# Altium PCB MCU_FOR_DOWNLOAD_V6_8_PCS.PcbDoc (part 1 of 4)
Units mil, origin at the board's own origin, x right, y up, seen from the top; angles counter-clockwise.
Board outline 4834.06 x 3482.15 mil, 4 copper layers (Top, GND1, GND2, Bottom), stack 35.4 mil thick; 280 components, 38 nets, 1144 pads, 944 vias.
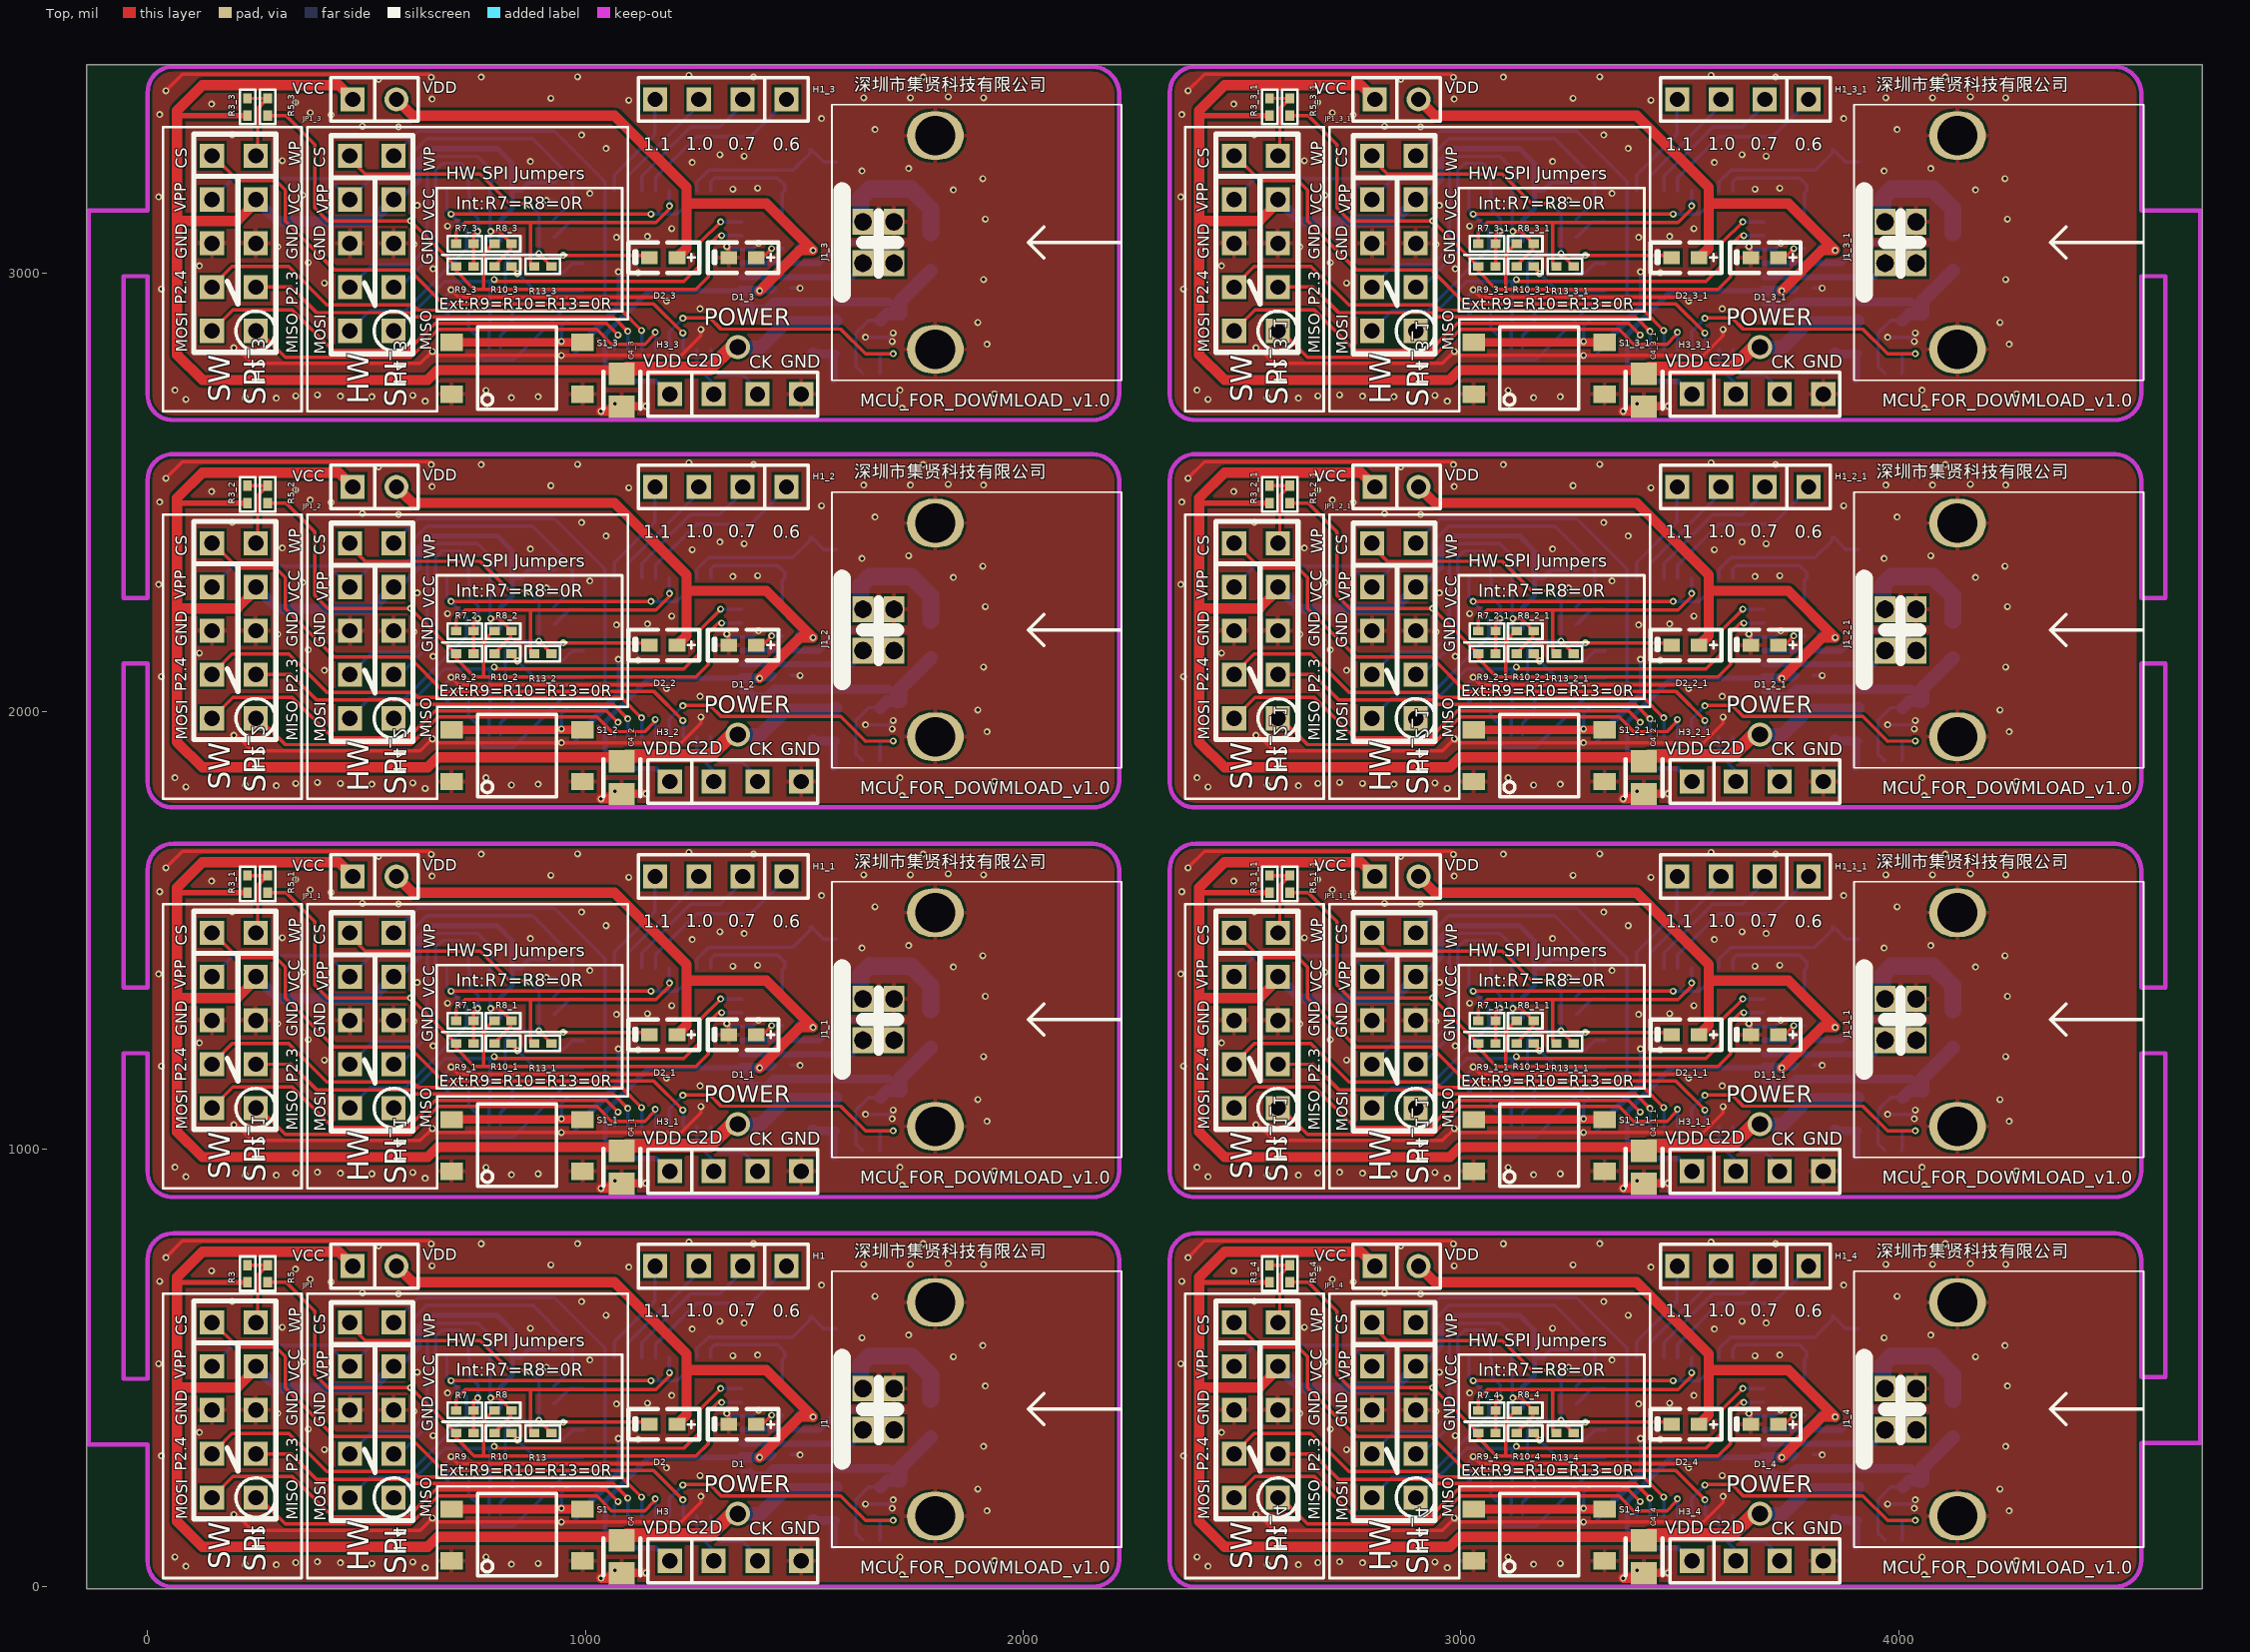
[diagram p0: Top view]
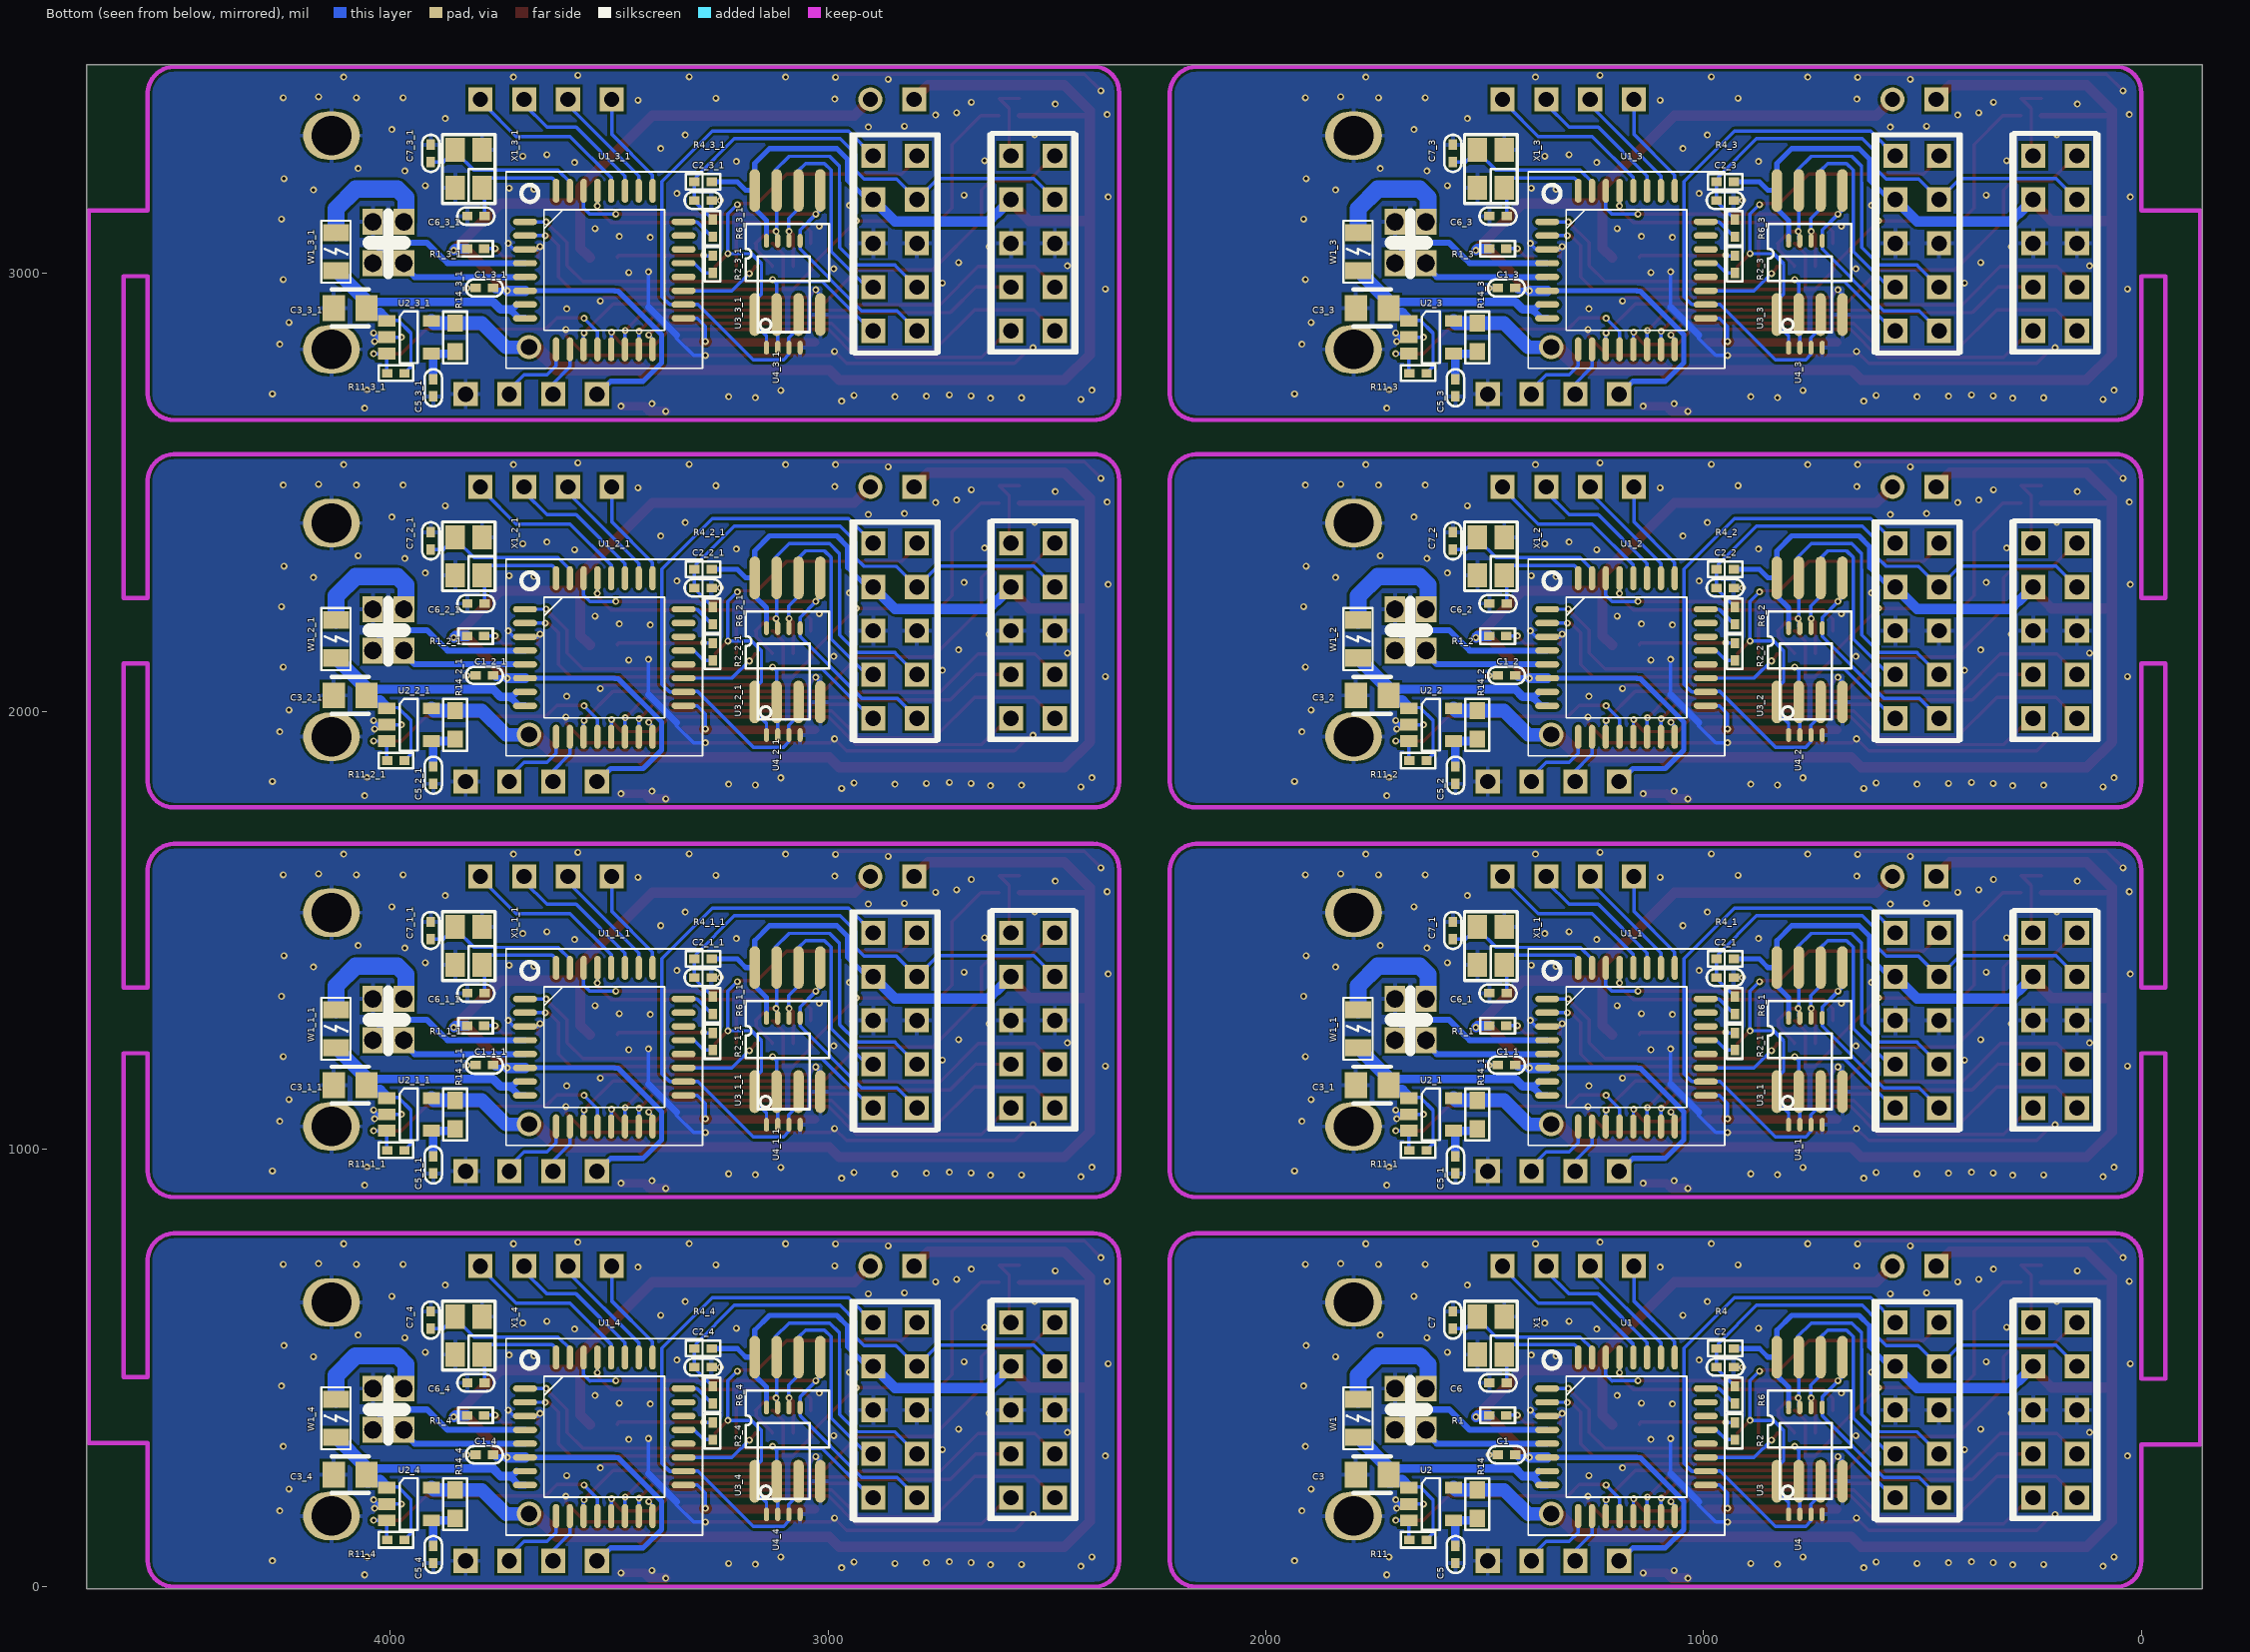
[diagram p1: Bottom view, seen from below]

## Layer stack, top to bottom
Top: signal copper 1.35
Dielectric: dielectric 10, FR-4, Dk 4.3
GND1: signal copper 1.35
Dielectric: dielectric 10, FR-4, Dk 4.3
GND2: signal copper 1.35
Dielectric: dielectric 10, FR-4, Dk 4.3
Bottom: signal copper 1.35

## Board outline
-140,-5.05 4694.06,-5.05 4694.06,3477.1 -140,3477.1

## Design rules (kind name [scope] priority, off if disabled: settings)
Clearance "'Default' PADS rule_18" [All] p1: gap=5.91
Clearance "'Default' PADS rule_15" [IsVia vs IsVia] p2: gap=5.91
ComponentClearance "'Default' PADS rule_12" [All] p1: gap=5.91 collisioncheckmode=3 verticalgap=10 showdistances=FALSE
FlightTimeFalling "'Default' PADS rule_10" [All] p1: maximum=10.00
FlightTimeRising "'Default' PADS rule_9" [All] p1: maximum=10.00
Length "'Default' PADS rule_5" [All] p1: maxlimit=50000 minlimit=0
MatchedLengths "'Default' PADS rule_11" [InNetClass('All Nets')] p1: tolerance=200 checknetsindiffpair=TRUE checkdiffpairvsdiffpair=TRUE checkothers=TRUE
MaxMinImpedance "'Default' PADS rule_8" [All] p1: minimum=50.00 maximum=150.0
ParallelSegment "'Default' PADS rule_7" [All] p1: limit=1000 gap=200
ParallelSegment "'Default' PADS rule_6" [All] p2: limit=1000 gap=200
PlaneClearance "'Default' PADS rule_14" [All] p1: clearance=15
PlaneConnect "Power Plane Connect Style - from global settings" [All] p1: planeconnectstyle=Relief reliefexpansion=20 reliefentries=2 reliefconductorwidth=15 reliefairgap=10
PolygonConnect PolygonConnect_via [IsVia] p1: connectstyle=Direct reliefconductorwidth=10 reliefentries=2 polygonreliefangle="90 Angle"
PolygonConnect PolygonConnect_Pad [All] p2: connectstyle=Relief reliefconductorwidth=10 reliefentries=4 polygonreliefangle="90 Angle"
RoutingLayers "'Default' PADS rule_3" [All] p1: top layer_v5=TRUE mid layer 1_v5=TRUE mid layer 2_v5=TRUE bottom layer_v5=TRUE
RoutingPriority "'Default' PADS rule_2" [All] p1: routingpriority=3
RoutingTopology "'Default' PADS rule" [All] p1: topology=Shortest
RoutingVias "'Default' PADS rule_4" [All] p1: holewidth=37 width=55 viastyle="Through Hole" minholewidth=37 minwidth=55 maxholewidth=37 maxwidth=55
SMDToCorner "'Default' PADS rule_16" [All] p1: distance=59055
SMDToPlane "'Default' PADS rule_17" [All] p1: distance=59055
SilkscreenOverComponentPads [All] p1: minsilkscreentomaskgap=10
SolderMaskExpansion "Solder Mask Expansion from CAM settings" [All] p1: expansion=5
Width "'Default' PADS rule_13" [All] p1: maxlimit=118.11 minlimit=5.91 preferedwidth=7.87
21 further rules are at their usual default settings.

## Components (designator, comment, footprint, x,y, rotation, side; value= is the part's Value field where it differs from the comment)
C1 "C0402" C0402 1450,301.57 r180 bottom
C1_1 "C0402" C0402 1450,1191.57 r180 bottom
C1_1_1 "C0402" C0402 3785,1191.57 r180 bottom
C1_2 "C0402" C0402 1450,2081.57 r180 bottom
C1_2_1 "C0402" C0402 3785,2081.57 r180 bottom
C1_3 "C0402" C0402 1450,2966.57 r180 bottom
C1_3_1 "C0402" C0402 3785,2966.57 r180 bottom
C1_4 "C0402" C0402 3785,301.57 r180 bottom
C2 "C0402" C0402 950.39,501.57 r0 bottom
C2_1 "C0402" C0402 950.39,1391.57 r0 bottom
C2_1_1 "C0402" C0402 3285.39,1391.57 r0 bottom
C2_2 "C0402" C0402 950.39,2281.57 r0 bottom
C2_2_1 "C0402" C0402 3285.39,2281.57 r0 bottom
C2_3 "C0402" C0402 950.39,3166.57 r0 bottom
C2_3_1 "C0402" C0402 3285.39,3166.57 r0 bottom
C2_4 "C0402" C0402 3285.39,501.57 r0 bottom
C3 "C0805" C0805 1756.69,255.91 r0 bottom
C3_1 "C0805" C0805 1756.69,1145.91 r0 bottom
C3_1_1 "C0805" C0805 4091.69,1145.91 r0 bottom
C3_2 "C0805" C0805 1756.69,2035.91 r0 bottom
C3_2_1 "C0805" C0805 4091.69,2035.91 r0 bottom
C3_3 "C0805" C0805 1756.69,2920.91 r0 bottom
C3_3_1 "C0805" C0805 4091.69,2920.91 r0 bottom
C3_4 "C0805" C0805 4091.69,255.91 r0 bottom
C4 "C0805" C0805 1083.07,68.11 r270 top
C4_1 "C0805" C0805 1083.07,958.11 r270 top
C4_1_1 "C0805" C0805 3418.07,958.11 r270 top
C4_2 "C0805" C0805 1083.07,1848.11 r270 top
C4_2_1 "C0805" C0805 3418.07,1848.11 r270 top
C4_3 "C0805" C0805 1083.07,2733.11 r270 top
C4_3_1 "C0805" C0805 3418.07,2733.11 r270 top
C4_4 "C0805" C0805 3418.07,68.11 r270 top
C5 "C0402" C0402 1566.54,73.62 r90 bottom
C5_1 "C0402" C0402 1566.54,963.62 r90 bottom
C5_1_1 "C0402" C0402 3901.54,963.62 r90 bottom
C5_2 "C0402" C0402 1566.54,1853.62 r90 bottom
C5_2_1 "C0402" C0402 3901.54,1853.62 r90 bottom
C5_3 "C0402" C0402 1566.54,2738.62 r90 bottom
C5_3_1 "C0402" C0402 3901.54,2738.62 r90 bottom
C5_4 "C0402" C0402 3901.54,73.62 r90 bottom
C6 "C0402" C0402 1469.29,465.75 r0 bottom
C6_1 "C0402" C0402 1469.29,1355.75 r0 bottom
C6_1_1 "C0402" C0402 3804.29,1355.75 r0 bottom
C6_2 "C0402" C0402 1469.29,2245.75 r0 bottom
C6_2_1 "C0402" C0402 3804.29,2245.75 r0 bottom
C6_3 "C0402" C0402 1469.29,3130.75 r0 bottom
C6_3_1 "C0402" C0402 3804.29,3130.75 r0 bottom
C6_4 "C0402" C0402 3804.29,465.75 r0 bottom
C7 "C0402" C0402 1572.44,609.06 r90 bottom
C7_1 "C0402" C0402 1572.44,1499.06 r90 bottom
C7_1_1 "C0402" C0402 3907.44,1499.06 r90 bottom
C7_2 "C0402" C0402 1572.44,2389.06 r90 bottom
C7_2_1 "C0402" C0402 3907.44,2389.06 r90 bottom
C7_3 "C0402" C0402 1572.44,3274.06 r90 bottom
C7_3_1 "C0402" C0402 3907.44,3274.06 r90 bottom
C7_4 "C0402" C0402 3907.44,609.06 r90 bottom
D1 "LED0603" LED0603 1358.27,370.87 r0 top
D1_1 "LED0603" LED0603 1358.27,1260.87 r0 top
D1_1_1 "LED0603" LED0603 3693.27,1260.87 r0 top
D1_2 "LED0603" LED0603 1358.27,2150.87 r0 top
D1_2_1 "LED0603" LED0603 3693.27,2150.87 r0 top
D1_3 "LED0603" LED0603 1358.27,3035.87 r0 top
D1_3_1 "LED0603" LED0603 3693.27,3035.87 r0 top
D1_4 "LED0603" LED0603 3693.27,370.87 r0 top
D2 "LED0603" LED0603 1177.17,370.87 r0 top
D2_1 "LED0603" LED0603 1177.17,1260.87 r0 top
D2_1_1 "LED0603" LED0603 3512.17,1260.87 r0 top
D2_2 "LED0603" LED0603 1177.17,2150.87 r0 top
D2_2_1 "LED0603" LED0603 3512.17,2150.87 r0 top
D2_3 "LED0603" LED0603 1177.17,3035.87 r0 top
D2_3_1 "LED0603" LED0603 3512.17,3035.87 r0 top
D2_4 "LED0603" LED0603 3512.17,370.87 r0 top
H1 "H04X1_SQUARE" H04X1_SQUARE 1459.06,732.28 r180 top
H1_1 "H04X1_SQUARE" H04X1_SQUARE 1459.06,1622.28 r180 top
H1_1_1 "H04X1_SQUARE" H04X1_SQUARE 3794.06,1622.28 r180 top
H1_2 "H04X1_SQUARE" H04X1_SQUARE 1459.06,2512.28 r180 top
H1_2_1 "H04X1_SQUARE" H04X1_SQUARE 3794.06,2512.28 r180 top
H1_3 "H04X1_SQUARE" H04X1_SQUARE 1459.06,3397.28 r180 top
H1_3_1 "H04X1_SQUARE" H04X1_SQUARE 3794.06,3397.28 r180 top
H1_4 "H04X1_SQUARE" H04X1_SQUARE 3794.06,732.28 r180 top
H2 "JH2X5" JH2X5 196.85,403.54 r90 top
H2_1 "JH2X5" JH2X5 196.85,1293.54 r90 top
H2_1_1 "JH2X5" JH2X5 2531.85,1293.54 r90 top
H2_2 "JH2X5" JH2X5 196.85,2183.54 r90 top
H2_2_1 "JH2X5" JH2X5 2531.85,2183.54 r90 top
H2_3 "JH2X5" JH2X5 196.85,3068.54 r90 top
H2_3_1 "JH2X5" JH2X5 2531.85,3068.54 r90 top
H2_4 "JH2X5" JH2X5 2531.85,403.54 r90 top
H3 "H04X1_SQUARE" H04X1_SQUARE 1192.91,59.06 r0 top
H3_1 "H04X1_SQUARE" H04X1_SQUARE 1192.91,949.06 r0 top
H3_1_1 "H04X1_SQUARE" H04X1_SQUARE 3527.91,949.06 r0 top
H3_2 "H04X1_SQUARE" H04X1_SQUARE 1192.91,1839.06 r0 top
H3_2_1 "H04X1_SQUARE" H04X1_SQUARE 3527.91,1839.06 r0 top
H3_3 "H04X1_SQUARE" H04X1_SQUARE 1192.91,2724.06 r0 top
H3_3_1 "H04X1_SQUARE" H04X1_SQUARE 3527.91,2724.06 r0 top
H3_4 "H04X1_SQUARE" H04X1_SQUARE 3527.91,59.06 r0 top
H4 "JH2X5" JH2X5 511.81,403.54 r90 top
H4_1 "JH2X5" JH2X5 511.81,1293.54 r90 top
H4_1_1 "JH2X5" JH2X5 2846.81,1293.54 r90 top
H4_2 "JH2X5" JH2X5 511.81,2183.54 r90 top
H4_2_1 "JH2X5" JH2X5 2846.81,2183.54 r90 top
H4_3 "JH2X5" JH2X5 511.81,3068.54 r90 top
H4_3_1 "JH2X5" JH2X5 2846.81,3068.54 r90 top
H4_4 "JH2X5" JH2X5 2846.81,403.54 r90 top
J1 "USB-6" USB-6 1633.86,405.51 r90 top
J1_1 "USB-6" USB-6 1633.86,1295.51 r90 top
J1_1_1 "USB-6" USB-6 3968.86,1295.51 r90 top
J1_2 "USB-6" USB-6 1633.86,2185.51 r90 top
J1_2_1 "USB-6" USB-6 3968.86,2185.51 r90 top
J1_3 "USB-6" USB-6 1633.86,3070.51 r90 top
J1_3_1 "USB-6" USB-6 3968.86,3070.51 r90 top
J1_4 "USB-6" USB-6 3968.86,405.51 r90 top
JP1 "H02X1" H02X1 468.11,732.28 r0 top
JP1_1 "H02X1" H02X1 468.11,1622.28 r0 top
JP1_1_1 "H02X1" H02X1 2803.11,1622.28 r0 top
JP1_2 "H02X1" H02X1 468.11,2512.28 r0 top
JP1_2_1 "H02X1" H02X1 2803.11,2512.28 r0 top
JP1_3 "H02X1" H02X1 468.11,3397.28 r0 top
JP1_3_1 "H02X1" H02X1 2803.11,3397.28 r0 top
JP1_4 "H02X1" H02X1 2803.11,732.28 r0 top
R1 "R0402" R0402 1470.08,391.34 r0 bottom
R1_1 "R0402" R0402 1470.08,1281.34 r0 bottom
R1_1_1 "R0402" R0402 3805.08,1281.34 r0 bottom
R1_2 "R0402" R0402 1470.08,2171.34 r0 bottom
R1_2_1 "R0402" R0402 3805.08,2171.34 r0 bottom
R1_3 "R0402" R0402 1470.08,3056.34 r0 bottom
R1_3_1 "R0402" R0402 3805.08,3056.34 r0 bottom
R1_4 "R0402" R0402 3805.08,391.34 r0 bottom
R2 "R0402" R0402 928.35,355.51 r270 bottom
R2_1 "R0402" R0402 928.35,1245.51 r270 bottom
R2_1_1 "R0402" R0402 3263.35,1245.51 r270 bottom
R2_2 "R0402" R0402 928.35,2135.51 r270 bottom
R2_2_1 "R0402" R0402 3263.35,2135.51 r270 bottom
R2_3 "R0402" R0402 928.35,3020.51 r270 bottom
R2_3_1 "R0402" R0402 3263.35,3020.51 r270 bottom
R2_4 "R0402" R0402 3263.35,355.51 r270 bottom
R3 "R0402" R0402 227.95,714.96 r270 top
R3_1 "R0402" R0402 227.95,1604.96 r270 top
R3_1_1 "R0402" R0402 2562.95,1604.96 r270 top
R3_2 "R0402" R0402 227.95,2494.96 r270 top
R3_2_1 "R0402" R0402 2562.95,2494.96 r270 top
R3_3 "R0402" R0402 227.95,3379.96 r270 top
R3_3_1 "R0402" R0402 2562.95,3379.96 r270 top
R3_4 "R0402" R0402 2562.95,714.96 r270 top
R4 "R0402" R0402 950.39,544.09 r180 bottom
R4_1 "R0402" R0402 950.39,1434.09 r180 bottom
R4_1_1 "R0402" R0402 3285.39,1434.09 r180 bottom
R4_2 "R0402" R0402 950.39,2324.09 r180 bottom
R4_2_1 "R0402" R0402 3285.39,2324.09 r180 bottom
R4_3 "R0402" R0402 950.39,3209.09 r180 bottom
R4_3_1 "R0402" R0402 3285.39,3209.09 r180 bottom
R4_4 "R0402" R0402 3285.39,544.09 r180 bottom
R5 "R0402" R0402 274.02,714.96 r270 top
R5_1 "R0402" R0402 274.02,1604.96 r270 top
R5_1_1 "R0402" R0402 2609.02,1604.96 r270 top
R5_2 "R0402" R0402 274.02,2494.96 r270 top
R5_2_1 "R0402" R0402 2609.02,2494.96 r270 top
R5_3 "R0402" R0402 274.02,3379.96 r270 top
R5_3_1 "R0402" R0402 2609.02,3379.96 r270 top
R5_4 "R0402" R0402 2609.02,714.96 r270 top
R6 "R0402" R0402 928.35,438.19 r90 bottom
R6_1 "R0402" R0402 928.35,1328.19 r90 bottom
R6_1_1 "R0402" R0402 3263.35,1328.19 r90 bottom
R6_2 "R0402" R0402 928.35,2218.19 r90 bottom
R6_2_1 "R0402" R0402 3263.35,2218.19 r90 bottom
R6_3 "R0402" R0402 928.35,3103.19 r90 bottom
R6_3_1 "R0402" R0402 3263.35,3103.19 r90 bottom
R6_4 "R0402" R0402 3263.35,438.19 r90 bottom
R7 "R0402" R0402 724.41,402.76 r180 top
R7_1 "R0402" R0402 724.41,1292.76 r180 top
R7_1_1 "R0402" R0402 3059.41,1292.76 r180 top
R7_2 "R0402" R0402 724.41,2182.76 r180 top
R7_2_1 "R0402" R0402 3059.41,2182.76 r180 top
R7_3 "R0402" R0402 724.41,3067.76 r180 top
R7_3_1 "R0402" R0402 3059.41,3067.76 r180 top
R7_4 "R0402" R0402 3059.41,402.76 r180 top
R8 "R0402" R0402 811.81,402.76 r0 top
R8_1 "R0402" R0402 811.81,1292.76 r0 top
R8_1_1 "R0402" R0402 3146.81,1292.76 r0 top
R8_2 "R0402" R0402 811.81,2182.76 r0 top
R8_2_1 "R0402" R0402 3146.81,2182.76 r0 top
R8_3 "R0402" R0402 811.81,3067.76 r0 top
R8_3_1 "R0402" R0402 3146.81,3067.76 r0 top
R8_4 "R0402" R0402 3146.81,402.76 r0 top
R9 "R0402" R0402 724.41,351.18 r180 top
R9_1 "R0402" R0402 724.41,1241.18 r180 top
R9_1_1 "R0402" R0402 3059.41,1241.18 r180 top
R9_2 "R0402" R0402 724.41,2131.18 r180 top
R9_2_1 "R0402" R0402 3059.41,2131.18 r180 top
R9_3 "R0402" R0402 724.41,3016.18 r180 top
R9_3_1 "R0402" R0402 3059.41,3016.18 r180 top
R9_4 "R0402" R0402 3059.41,351.18 r180 top
R10 "R0402" R0402 811.81,351.18 r180 top
R10_1 "R0402" R0402 811.81,1241.18 r180 top
R10_1_1 "R0402" R0402 3146.81,1241.18 r180 top
R10_2 "R0402" R0402 811.81,2131.18 r180 top
R10_2_1 "R0402" R0402 3146.81,2131.18 r180 top
R10_3 "R0402" R0402 811.81,3016.18 r180 top
R10_3_1 "R0402" R0402 3146.81,3016.18 r180 top
R10_4 "R0402" R0402 3146.81,351.18 r180 top
R11 "R0402" R0402 1652.36,107.09 r0 bottom
R11_1 "R0402" R0402 1652.36,997.09 r0 bottom
R11_1_1 "R0402" R0402 3987.36,997.09 r0 bottom
R11_2 "R0402" R0402 1652.36,1887.09 r0 bottom
R11_2_1 "R0402" R0402 3987.36,1887.09 r0 bottom
R11_3 "R0402" R0402 1652.36,2772.09 r0 bottom
R11_3_1 "R0402" R0402 3987.36,2772.09 r0 bottom
R11_4 "R0402" R0402 3987.36,107.09 r0 bottom
R13 "R0402" R0402 902.76,351.18 r0 top
R13_1 "R0402" R0402 902.76,1241.18 r0 top
R13_1_1 "R0402" R0402 3237.76,1241.18 r0 top
R13_2 "R0402" R0402 902.76,2131.18 r0 top
R13_2_1 "R0402" R0402 3237.76,2131.18 r0 top
R13_3 "R0402" R0402 902.76,3016.18 r0 top
R13_3_1 "R0402" R0402 3237.76,3016.18 r0 top
R13_4 "R0402" R0402 3237.76,351.18 r0 top
R14 "R0603" R0603 1516.93,188.58 r270 bottom
R14_1 "R0603" R0603 1516.93,1078.58 r270 bottom
R14_1_1 "R0603" R0603 3851.93,1078.58 r270 bottom
R14_2 "R0603" R0603 1516.93,1968.58 r270 bottom
R14_2_1 "R0603" R0603 3851.93,1968.58 r270 bottom
R14_3 "R0603" R0603 1516.93,2853.58 r270 bottom
R14_3_1 "R0603" R0603 3851.93,2853.58 r270 bottom
R14_4 "R0603" R0603 3851.93,188.58 r270 bottom
S1 "4PIN_SWITCH_SMD_4.5MM" 4PIN_SWITCH_SMD_4.5MM 843.7,118.11 r90 top
S1_1 "4PIN_SWITCH_SMD_4.5MM" 4PIN_SWITCH_SMD_4.5MM 843.7,1008.11 r90 top
S1_1_1 "4PIN_SWITCH_SMD_4.5MM" 4PIN_SWITCH_SMD_4.5MM 3178.7,1008.11 r90 top
S1_2 "4PIN_SWITCH_SMD_4.5MM" 4PIN_SWITCH_SMD_4.5MM 843.7,1898.11 r90 top
S1_2_1 "4PIN_SWITCH_SMD_4.5MM" 4PIN_SWITCH_SMD_4.5MM 3178.7,1898.11 r90 top
S1_3 "4PIN_SWITCH_SMD_4.5MM" 4PIN_SWITCH_SMD_4.5MM 843.7,2783.11 r90 top
S1_3_1 "4PIN_SWITCH_SMD_4.5MM" 4PIN_SWITCH_SMD_4.5MM 3178.7,2783.11 r90 top
S1_4 "4PIN_SWITCH_SMD_4.5MM" 4PIN_SWITCH_SMD_4.5MM 3178.7,118.11 r90 top
U1 "LQFP-32" LQFP-32 1357.09,452.76 r180 bottom
U1_1 "LQFP-32" LQFP-32 1357.09,1342.76 r180 bottom
U1_1_1 "LQFP-32" LQFP-32 3692.09,1342.76 r180 bottom
U1_2 "LQFP-32" LQFP-32 1357.09,2232.76 r180 bottom
U1_2_1 "LQFP-32" LQFP-32 3692.09,2232.76 r180 bottom
U1_3 "LQFP-32" LQFP-32 1357.09,3117.76 r180 bottom
U1_3_1 "LQFP-32" LQFP-32 3692.09,3117.76 r180 bottom
U1_4 "LQFP-32" LQFP-32 3692.09,452.76 r180 bottom
U2 "SOT23-5_SGM2019" SOT23-5_SGM2019 1673.23,188.98 r180 bottom
U2_1 "SOT23-5_SGM2019" SOT23-5_SGM2019 1673.23,1078.98 r180 bottom
U2_1_1 "SOT23-5_SGM2019" SOT23-5_SGM2019 4008.23,1078.98 r180 bottom
U2_2 "SOT23-5_SGM2019" SOT23-5_SGM2019 1673.23,1968.98 r180 bottom
U2_2_1 "SOT23-5_SGM2019" SOT23-5_SGM2019 4008.23,1968.98 r180 bottom
U2_3 "SOT23-5_SGM2019" SOT23-5_SGM2019 1673.23,2853.98 r180 bottom
U2_3_1 "SOT23-5_SGM2019" SOT23-5_SGM2019 4008.23,2853.98 r180 bottom
U2_4 "SOT23-5_SGM2019" SOT23-5_SGM2019 4008.23,188.98 r180 bottom
U3 "SO8W" SO8W 757.48,382.68 r180 bottom
U3_1 "SO8W" SO8W 757.48,1272.68 r180 bottom
U3_1_1 "SO8W" SO8W 3092.48,1272.68 r180 bottom
U3_2 "SO8W" SO8W 757.48,2162.68 r180 bottom
U3_2_1 "SO8W" SO8W 3092.48,2162.68 r180 bottom
U3_3 "SO8W" SO8W 757.48,3047.68 r180 bottom
U3_3_1 "SO8W" SO8W 3092.48,3047.68 r180 bottom
U3_4 "SO8W" SO8W 3092.48,382.68 r180 bottom
U4 "SO8-TSS" SO8-TSS 805.51,165.35 r90 bottom
U4_1 "SO8-TSS" SO8-TSS 805.51,1055.35 r90 bottom
U4_1_1 "SO8-TSS" SO8-TSS 3140.51,1055.35 r90 bottom
U4_2 "SO8-TSS" SO8-TSS 805.51,1945.35 r90 bottom
U4_2_1 "SO8-TSS" SO8-TSS 3140.51,1945.35 r90 bottom
U4_3 "SO8-TSS" SO8-TSS 805.51,2830.35 r90 bottom
U4_3_1 "SO8-TSS" SO8-TSS 3140.51,2830.35 r90 bottom
U4_4 "SO8-TSS" SO8-TSS 3140.51,165.35 r90 bottom
W1 "SMD0805" SMD0805 1788.98,384.65 r90 bottom
W1_1 "SMD0805" SMD0805 1788.98,1274.65 r90 bottom
W1_1_1 "SMD0805" SMD0805 4123.98,1274.65 r90 bottom
W1_2 "SMD0805" SMD0805 1788.98,2164.65 r90 bottom
W1_2_1 "SMD0805" SMD0805 4123.98,2164.65 r90 bottom
W1_3 "SMD0805" SMD0805 1788.98,3049.65 r90 bottom
W1_3_1 "SMD0805" SMD0805 4123.98,3049.65 r90 bottom
W1_4 "SMD0805" SMD0805 4123.98,384.65 r90 bottom
X1 "3225_4" 3225_4 1485.83,573.62 r90 bottom
X1_1 "3225_4" 3225_4 1485.83,1463.62 r90 bottom
X1_1_1 "3225_4" 3225_4 3820.83,1463.62 r90 bottom
X1_2 "3225_4" 3225_4 1485.83,2353.62 r90 bottom
X1_2_1 "3225_4" 3225_4 3820.83,2353.62 r90 bottom
X1_3 "3225_4" 3225_4 1485.83,3238.62 r90 bottom
X1_3_1 "3225_4" 3225_4 3820.83,3238.62 r90 bottom
X1_4 "3225_4" 3225_4 3820.83,573.62 r90 bottom

## Footprints (in the part's own frame and the unit in brackets; to place one, negate y for a bottom-side part, rotate by r counter-clockwise, add the part's x,y. Pads: shape width x height; smd on the part's side, far side on the other; paste and mask are expansions set on the pad)
4PIN_SWITCH_SMD_4.5MM [mm]
  rect 1x1.3 smd: 1(-1.5,3.8) 2(1.5,3.8) 3(-1.5,-3.8) 4(1.5,-3.8)
  silkscreen extent -2.37,-2.3 2.4,2.3
3225_4 [mm]
  rect 1.4x1.15 smd: 1(-1.1,-0.782) 2(1.1,-0.782) 3(1.1,0.782) 4(-1.1,0.782)
  silkscreen extent -2,-1.52 2,1.52
C0402 [mm]
  rect 0.6x0.5 smd: 1(-0.5,0) 2(0.5,0)
  silkscreen extent -1.07,-0.5 1.07,0.5
C0805 [mil]
  rect 50.98x59.02 smd: 1(-37.48,0) 2(37.48,0)
  silkscreen extent -43,-42 43,42
H02X1 [mil]
  rect 55x55 / inner round 55 / far side rect 55x55 hole 35: 1(0,0)
  round 55 hole 35: 2(100,0)
  silkscreen extent -50,-50 150,50
H04X1_SQUARE [mil]
  rect 55x55 hole 35: 1(0,0) 2(100,0) 3(200,0) 4(300,0)
  silkscreen extent -50,-50 338,50
JH2X5 [mil]
  rect 55x55 hole 35: 1(-200,-50) 2(-200,50) 3(-100,-50) 4(-100,50) 5(0,-50) 6(0,50) 7(100,-50) 8(100,50) 9(200,-50) 10(200,50)
  silkscreen extent -245,-95 -155,-5
LED0603 [mil]
  rect 38x30 smd paste+1.18 mask+1.18: 1(-31,0) 2(31.99,0)
  silkscreen extent -79,-35 83,35
LQFP-32 [mm]
  oval 1.4x0.37 smd: 1(0,0) 2(0,-0.8) 3(0,-1.6) 4(0,-2.4) 5(0,-3.2) 6(0,-4) 7(0,-4.8) 8(0,-5.6) 17(9.2,-5.6) 18(9.2,-4.8) 19(9.2,-4) 20(9.2,-3.2) 21(9.2,-2.4) 22(9.2,-1.6) 23(9.2,-0.8) 24(9.2,0)
  oval 0.37x1.4 smd: 9(1.8,-7.4) 10(2.6,-7.4) 11(3.4,-7.4) 12(4.2,-7.4) 13(5,-7.4) 14(5.8,-7.4) 15(6.6,-7.4) 16(7.4,-7.4) 25(7.4,1.8) 26(6.6,1.8) 27(5.8,1.8) 28(5,1.8) 29(4.2,1.8) 30(3.4,1.8) 31(2.6,1.8) 32(1.8,1.8)
  silkscreen extent -1.1,-8.5 10.3,2.9
R0402 [mm]
  rect 0.6x0.5 smd: 1(-0.5,0) 2(0.5,0)
  silkscreen extent -1,-0.45 1,0.45
R0603 [mm]
  rect 1x0.9 smd: 1(-0.826,0) 2(0.826,0)
  silkscreen extent -1.5,-0.7 1.5,0.7
SMD0805 [mm]
  rect 1x1.5 smd paste-0.1 mask-0.1: 1(-1.1,0) 2(1.1,0)
  silkscreen extent -1.8,-0.85 1.8,0.85
SO8-TSS [mm]
  oval 0.8x0.3 smd: 1(0,0) 2(0,-0.65) 3(0,-1.3) 4(0,-1.95) 5(6.2,-1.95) 6(6.2,-1.3) 7(6.2,-0.65) 8(6.2,0)
  silkscreen extent 0.9,-2.5 5.3,0.5
SO8W [mil]
  oval 24x97.62 smd paste-11.81 mask-11.81: 1(-75,-141.73) 2(-25,-141.73) 3(25,-141.73) 4(75,-141.73) 5(75,141.73) 6(25,141.73) 7(-25,141.73) 8(-75,141.73)
  silkscreen extent -95,-65 95,65
SOT23-5_SGM2019 [mm]
  rect 1x0.69 smd: 1(0,0.95) 2(0,0) 3(0,-0.95) 4(2.6,-0.95) 5(2.6,0.95)
  silkscreen extent 0.76,-1.5 1.8,1.5
USB-6 [mm]
  rect 1.5x1.2 / inner rect 0x0 / far side rect 1.5x1.2 hole 1: 1(1.2,0) 2(-1.2,0) 3(-1.2,-1.8) 4(1.2,-1.8)
  oval 2.8x3.3 / inner round 0 / far side oval 2.8x3.3 hole 2.3: 5(6.2,-4.2) 6(-6.2,-4.2)
  silkscreen extent -8,-15 8,1.8

## Via types
v1: diameter 16/16/16/16 (per signal layer), hole 8, Top to Bottom, 936 vias
v2: diameter 55/55/55/55 (per signal layer), hole 37, Top to Bottom, 8 vias

## Nets (pads, with @x,y where several pads share a name; then routed paths per layer and width w, separated by ;. In a path a pad name is that pad's centre, name@x,y a point inside that pad or via, vN(x,y) a via of type N, cw(c..) or ccw(c..) an arc to the next point about the centre after c; other vN are vias at no path point)
+5V: C3.1 R11.1 U1.7 U1.8 U2.1 W1.1 | length 791.9
  Bottom w7.87: R11.1@1632.68,107.09 1619.29,120.47 1617.72,120.47 1617.72,198.57 1646.88,227.73 1647.02,227.73 1647.24,227.95 1673.23,227.95 1674.02,227.18 U2.1@1673.23,226.38
  Bottom w9.84: U1.7@1357.09,263.78 U1.7@1376.38,263.78
  Bottom w15.75: U1.8@1357.09,232.28 1370.87,232.28 1389.37,250.79 U1.7@1376.38,263.78
  Bottom w19.68: 1389.37,250.79 1391.14,252.56 1412.8,252.56 1430.31,270.08 1692.05,270.08 1718.9,256.07 C3.1@1719.21,255.91
  Bottom w27.56: U2.1@1674.02,227.18 1688.98,242.52 C3.1@1712.99,242.52
  Bottom w31.5: C3.1@1712.99,242.52 1718.82,242.52 C3.1@1718.9,245.19 ; W1.1@1788.98,341.34 1718.9,271.26 1718.9,256.07 1718.9,255.91 C3.1@1718.9,245.19 ; C3.1@1718.9,245.19 1718.9,243.23 C3.1@1719.21,255.91 C3.1@1718.9,245.19
C2CK: H3.3 U1.9 | length 186.3
  Bottom w7.87: U1.9@1286.22,161.42 1286.22,123.62 1306.5,103.35 1359.06,103.35 1398.13,64.27 1400.79,61.61 H3.3@1392.91,59.06
C2D: H3.2 U1.10 | length 130.9
  Bottom w7.87: U1.10@1254.72,161.42 1254.72,122.05 1297.01,79.76 1297.01,59.26 1300.59,59.26 H3.2@1292.91,59.06
GGND: C1.1 C2.1 C3.2 C4.2 C5.1 C6.2 C7.2 D1.1 H2.5 H2.6 H3.4 H4.5 H4.6 J1.4 J1.5 J1.6 S1.1 S1.3 U1.3 U2.2 U3.4 U4.4 X1.2 X1.4 | length 2977.8
  Top w7.87: v1(41.34,751.97) 79.53,790.16 644.09,790.16 648.03,786.22 v1(648.03,783.07) ; v1(196.85,164.96) 202.76,164.96 238.58,129.13 622.83,129.13 v1@648.83,155.13 ; v1(692.91,297.24) 693.31,297.24 710.63,279.92 1176.77,279.92 v1(1185.04,271.65) ; v1(1263.78,206.69) 1263.39,192.13 1218.9,147.64 v1(944.88,147.64) 660.24,147.64 649.21,154.89 v1@648.83,155.13 ; v1(1322.83,396.06) 1327.27,391.63 D1.1@1327.27,370.87 ; v1@648.83,155.13 646.46,156.69 v1(650.39,156.69) v1@648.83,155.13
  Top w19.68: C4.2@1083.07,30.63 1083.94,31.5 v1(1137.8,31.5)
  Top w22.05: v1(1035.43,19.69) 1072.13,19.69 1078.39,25.95 C4.2@1083.07,30.63
  Bottom w7.87: v1(692.91,297.24) 692.91,296.65 U3.4@682.48,286.22 ; v1(910.63,501.57) 911.02,501.57 C2.1@930.71,501.57 ; v1(944.88,147.64) 972.05,147.64 1011.02,186.61 1011.02,193.7 ; v1(1074.8,338.58) 1075.2,338.19 1075.2,257.87 ; v1(1322.83,396.06) 1328.6,390.3 1328.6,390.01 1328.85,389.76 U1.3@1357.09,389.76 1381.89,389.76 v1(1395.67,403.54) ; C1.1@1469.68,301.58 1489.76,301.58 v1(1490.16,301.18) ; v1(1639.76,188.98) U2.2@1673.23,188.98 1690.94,188.98 U2.2@1691.73,188.19 ; v1(1700.79,179.13) U2.2@1691.73,188.19 ; v1(1702.76,198.82) 1692.13,188.19 U2.2@1691.73,188.19 ; U3.4@682.48,286.22 U3.4@682.48,240.94 682.48,238 686.32,241.84 U3.4@682.48,286.22
  Bottom w15.75: 1011.02,193.7 1075.2,257.87
  other v1: 1723.62,27.17 1066.93,37.4 633.86,43.31 87.4,46.85 293.7,50 222.83,50.79 830.71,51.18 512.2,53.15 891.73,53.15 338.19,55.12 440.16,54.72 605.51,56.3 387.8,57.09 1934.25,59.45 61.81,68.11 772.83,67.72 1718.5,68.11 1917.32,173.23 1896.46,222.83 1261.81,253.94 31.5,299.21 403.54,312.99 1909.45,320.87 1120.08,336.61 651.97,345.28 118.11,352.36 366.54,359.84 297.24,395.67 608.27,401.18 1070.87,417.32 1141.73,419.29 1196.85,437.01 685.04,442.91 1913.39,458.66 616.14,490.16 25.2,509.45 354.33,513.78 1009.84,517.72 1840.55,525.59 1336.61,527.56 1393.31,529.53 1584.65,535.43 1907.48,551.18 1631.89,568.9 1738.19,574.8 1244.09,588.58 874.02,590.55 307.09,592.52 1362.2,602.36 1307.09,606.3 1047.24,620.08 991.34,651.18 192.91,651.57 1661.42,663.39 572.83,669.29 490.16,671.26 1539.37,688.98 419.29,696.46 27.56,697.64 371.26,701.97 145.67,721.65 337.4,725.59 1098.82,730.31 649.61,733.07 921.26,735.04 1635.83,736.22 1742.13,736.22 1909.45,736.22 1828.74,738.19 527.56,778.35 761.81,783.46 982.28,783.86 1383.86,783.46 1771.65,783.46 1236.22,787.4
HW_HOLD: R10.1 U1.19 | length 188.6
  Top w7.87: R10.1@831.5,351.18 832.28,350.39 832.28,348.03 838.39,341.93 838.39,340.75 v1(844.49,334.65)
  Bottom w7.87: v1(844.49,334.65) 845.28,334.65 884.65,295.28 U1.19@994.88,295.28
HW_HOLD_1: H4.4 R8.2 R10.2 U3.7 U4.7 | length 860.6
  Top w7.87: v1(783.46,431.1) 803.15,431.1 R8.2@831.5,402.76 ; R10.2@792.13,351.18 792.13,352.76 828.74,389.37 828.74,401.22 829.12,401.59 R8.2@829.12,401.95
  Bottom w7.87: H4.4@461.81,303.54 511.42,353.15 511.42,353.94 598.82,353.94 638.58,393.7 638.58,542.91 638.98,543.31 638.98,580.31 661.02,602.36 753.9,602.36 785.12,571.14 785.12,527.05 U3.7@782.48,524.41 782.48,431.1 v1@782.48,430.31 ; U4.7@779.92,409.45 782.48,412.01 v1@782.48,430.31 ; v1(783.46,431.1) 782.68,430.31 v1@782.48,430.31
HW_MISO: H4.1 U1.1 U3.2 U4.2 | length 1088.6
  Top w7.87: v1(791.34,320.87) 795.67,316.54 795.67,316.34 1225.2,316.34 1261.42,352.56 1261.42,405.12 v1(1309.06,452.76)
  Bottom w7.87: H4.1@565.4,210.1 569.82,210.1 570.87,209.06 677.97,316.16 782.48,316.16 782.48,313.78 ; U4.2@779.92,165.35 779.92,219.69 782.48,222.24 U3.2@782.48,240.94 782.48,313.78 ; v1(791.34,320.87) 784.25,313.78 782.48,313.78 ; v1(1309.06,452.76) U1.1@1357.09,452.76
  Bottom w11.81: H4.1@561.81,203.54 565.4,207.13 H4.1@565.4,210.1
HW_MOSI: H4.2 U1.30 U3.5 U4.5 | length 1074.3
  Top w7.87: v1(692.91,470.47) v1(1149.61,470.47)
  Bottom w7.87: H4.2@463.55,206.92 464.09,206.92 465.75,208.58 466.54,208.58 507.56,249.61 587.8,249.61 728.74,390.55 U4.5@728.74,409.45 728.74,433.86 692.52,470.08 v1@692.13,470.47 ; U3.5@682.48,524.41 683.46,523.43 683.46,479.13 v1@692.13,470.47 ; v1(692.91,470.47) v1@692.13,470.47 ; v1(1149.61,470.47) 1208.27,470.47 1208.66,470.08 1223.23,484.65 U1.30@1223.23,523.62
  Bottom w11.81: H4.2@461.81,203.54 H4.2@463.55,206.92
HW_NSS: R7.2 R13.1 U1.29 | length 677.5
  Top w7.87: R7.2@704.72,402.76 704.72,430.31 725.2,450.79 874.8,450.79 ; R13.1@874.8,351.57 874.8,450.79 ; v1(1191.73,488.98) 1192.52,488.19 1192.52,482.68 1160.63,450.79 874.8,450.79
  Bottom w7.87: v1(1191.73,488.98) U1.29@1191.73,523.62
HW_NSS_1: H4.10 R13.2 U3.1 U4.1 | length 921.4
  Top w7.87: H4.10@461.81,603.54 460.63,603.54 458.27,601.18 458.86,600.59 497.24,562.2 759.45,562.2 826.77,494.88 869.29,494.88 v1(872.05,492.13) ; v1(893.7,379.92) R13.2@922.44,351.18
  Bottom w7.87: U4.1@805.51,165.35 805.51,192.13 832.48,219.09 U3.1@832.48,240.94 833.07,241.54 833.07,272.05 816.93,288.19 816.93,357.09 839.76,379.92 v1(893.7,379.92) 893.7,470.47 v1(872.05,492.13)
HW_SCK: R5.2 R8.1 R9.2 U1.2 | length 1562.8
  Top w7.87: R5.2@274.02,695.28 316.14,695.28 381.89,629.53 381.89,484.25 411.42,454.72 v1(600.39,454.72) 701.97,353.15 701.97,351.18 701.97,342.52 706.5,337.99 ; R9.2@704.72,351.18 706.5,349.41 706.5,337.99 ; R8.1@792.13,402.76 790.55,402.76 767.5,379.7 767.5,350.79 767.13,301.57 766.54,298.43 ; v1(1311.02,421.26) 1309.45,422.83 1305.12,422.83 1301.77,419.49 1300.98,419.49 1280.51,399.02 1280.51,326.57 1252.36,298.43 766.54,298.43 ; 706.5,337.99 743.5,300.98 746.06,298.43 766.54,298.43
  Bottom w7.87: v1(1311.02,421.26) U1.2@1357.09,421.26
HW_SCK_1: H4.3 R7.1 R9.1 U3.6 U4.6 | length 659.6
  Top w7.87: R9.1@744.09,351.18 R7.1@744.09,402.76 744.09,423.62 751.18,430.71 753.54,430.71 v1(753.94,431.1)
  Bottom w7.87: H4.3@561.81,303.54 575.2,303.54 575.98,302.76 658.27,385.04 658.27,571.26 673.23,586.22 715.94,586.22 732.48,569.69 U3.6@732.48,524.41 733.86,523.03 733.86,480.71 754.33,460.24 754.33,431.1 v1(753.94,431.1) 754.33,430.71 U4.6@754.33,409.45
HW_WP: H4.9 U1.18 U3.3 U4.3 | length 1272.4
  Bottom w7.87: H4.9@561.81,603.54 618.11,659.84 929.53,659.84 1044.49,544.88 1044.49,281.5 1026.77,263.78 U1.18@994.88,263.78 994.09,264.57 962.6,264.57 835.83,137.8 766.54,137.8 754.33,150 U4.3@754.33,165.35 754.33,187.8 733.07,209.06 733.07,240.35 U3.3@732.48,240.94
LDO_EN: R11.2 U1.12 U2.3 | length 673.1
  Top w7.87: v1(1222.44,232.28) 1223.62,233.46 1283.86,233.46 1309.65,207.68 1583.27,207.68 1639.76,151.18 1640.16,151.57 v1(1702.76,151.57)
  Bottom w7.87: U1.12@1191.73,161.42 1191.73,201.18 1222.44,231.89 v1(1222.44,232.28) ; R11.2@1672.05,107.09 1673.23,108.27 U2.3@1673.23,151.57 v1(1702.76,151.57)
N3634951: J1.3 U1.4 | length 392.4
  Bottom w13.78: U1.4@1357.09,358.27 1534.25,358.27 1551.18,375.2 1580.71,404.72 1668.9,404.72 1704.72,368.9 J1.3@1704.72,358.27
N3635015: J1.2 U1.5 | length 294
  Bottom w13.78: U1.5@1357.09,326.77 1609.45,326.77 1633.46,350.79 1633.86,351.18 J1.2@1633.86,358.27
N3708200: C5.2 R14.2 U2.4 | length 114.1
  Bottom w19.68: R14.2@1516.93,156.08 1522.66,156.08 1527.17,151.57 U2.4@1566.54,151.57 ; C5.2@1566.54,93.31 U2.4@1566.54,151.57 ; U2.4@1570.87,151.57 U2.4@1566.54,151.57
N3716250: J1.1 W1.2 | length 299.9
  Bottom w39.37: J1.1@1633.86,452.76 1629.14,454.78 1628.99,454.93 1628.99,508.12 1648.43,527.56 1744.09,527.56 1788.98,482.68 W1.2@1788.98,427.95
N3755063: D1.2 R1.1 | length 69.9
  Top w7.87: D1.2@1390.26,370.87 1390.26,372.44 1405.91,372.44 v1(1425.2,391.73)
  Bottom w7.87: v1(1425.2,391.73) 1450,391.73 R1.1@1450.39,391.34
N16414028: S1.2 S1.4 U1.17 | length 440.8
  Top w7.87: v1(944.88,179.13) 991.34,179.13 S1.4@993.31,177.17
  Top w19.68: S1.2@694.09,177.17 944.88,177.17 S1.4@993.31,177.17
  Bottom w7.87: v1(944.88,179.13) 945.28,179.53 945.28,214.17 963.39,232.28 U1.17@994.88,232.28
N16416150: H2.9 R3.1 R5.1 | length 188.4
  Top w7.87: R3.1@227.95,734.65 R5.1@274.02,734.65 251.18,711.81 251.18,611.02 246.85,606.69 H2.9@246.85,603.54
N16446401: R6.1 U1.24 | length 80.7
  Bottom w7.87: R6.1@928.35,418.5 929.92,418.5 964.17,452.76 U1.24@994.88,452.76
N16626884: C6.1 U1.32 X1.1 | length 272.5
  Bottom w7.87: U1.32@1286.22,523.62 1286.22,544.09 1294.88,552.76 1438.58,552.76 1455.04,536.3 X1.1@1455.04,530.31 1455.04,524.33 1449.61,518.9 C6.1@1449.61,465.75
N16627190: C7.1 U1.31 X1.3 | length 384.8
  Bottom w7.87: U1.31@1254.72,523.62 1254.72,543.7 1281.5,570.47 1473.62,570.47 1512.99,609.84 1512.99,616.93 1512.99,617.32 1516.22,617.32 X1.3@1516.61,616.93 1543.31,590.24 1543.31,589.37 C7.1@1572.44,589.37
N16638101: H1.1 U1.28 | length 409.9
  Bottom w7.87: U1.28@1160.24,523.62 1160.24,553.54 1254.33,647.64 1377.56,647.64 1450.79,720.87 1459.06,720.87 1459.45,720.87 1459.45,724.02 H1.1@1459.06,732.28
N16638386: H1.2 U1.27 | length 343.3
  Bottom w7.87: U1.27@1128.74,523.62 1128.74,557.48 1240.16,668.9 1307.09,668.9 1359.06,720.87 H1.2@1359.06,732.28
N16638553: H1.3 U1.26 | length 275.7
  Bottom w7.87: U1.26@1097.24,523.62 1097.24,557.09 1259.06,718.9 H1.3@1259.06,732.28
N16638723: H1.4 U1.25 | length 247.3
  Bottom w7.87: U1.25@1065.75,523.62 1065.75,559.45 1159.06,652.76 H1.4@1159.06,732.28
N16668632: R2.2 U1.21 | length 75.8
  Bottom w7.87: R2.2@928.35,335.83 948.82,335.83 970.47,357.48 994.09,357.48 U1.21@994.88,358.27
N16675349: D2.1 R2.1 | length 221.6
  Top w7.87: v1(948.82,375.98) 1143.31,375.98 1146.17,373.13 D2.1@1146.17,370.87
  Bottom w7.87: R2.1@928.35,375.2 948.03,375.2 v1(948.82,375.98)
P2.3: H2.3 U1.15 | length 933.2
  Top w7.87: H2.3@246.85,303.54 327.17,303.54 327.36,303.74 385.83,245.28 599.21,245.28 609.06,235.43 1063.78,235.43 v1(1096.46,202.76)
  Bottom w7.87: v1(1096.46,202.76) 1097.24,201.97 U1.15@1097.24,161.42
P2.4: H2.4 U1.14 | length 1105.2
  Top w7.87: H2.4@146.85,303.54 146.85,304.72 192.52,350.39 322.34,350.39 409.45,263.29 605.02,263.29 617.32,250.98 1081.69,250.98 v1(1127.95,204.72)
  Bottom w7.87: v1(1127.95,204.72) 1128.74,203.94 U1.14@1128.74,161.42
SW_CS: H2.10 U1.11 | length 1323.6
  Top w7.87: H2.10@146.85,603.54 149.2,603.54 203.54,549.2 203.54,547.24 292.52,547.24 314.57,525.2 314.57,454.33 425.59,343.31 597.05,343.31 674.8,265.55 1155.71,265.55 v1(1222.44,198.82)
  Bottom w7.87: v1(1222.44,198.82) 1223.23,198.03 U1.11@1223.23,161.42
SW_MISO: H2.1 U1.13 | length 1031
  Top w7.87: H2.1@246.85,203.54 251.68,203.54 255.02,200.2 257.58,200.2 314.17,143.6 600.39,143.6 663.78,206.99 1025.89,206.99 1059.65,173.23 1135.33,173.23 1156.59,194.49 1156.99,194.49 1156.99,198.33 v1(1159.45,200.79)
  Bottom w7.87: v1(1159.45,200.79) 1160.24,200 U1.13@1160.24,161.42
SW_MOSI: H2.2 U1.16 | length 1059
  Top w7.87: H2.2@146.85,203.54 194.88,251.57 329.92,251.57 422.44,159.06 594.49,159.06 656.3,220.87 1048.03,220.87 v1(1074.41,194.49)
  Bottom w7.87: U1.16@1065.75,161.42 1065.75,185.83 v1(1074.41,194.49)
VCC: C4.1 H2.7 H4.7 JP1.1 R3.2 R4.2 R14.1 U2.5 U3.8 U4.8 | length 3963.7
  Top w7.87: 67.32,695.28 69.69,695.28
  Top w11.81: 69.69,695.28 R3.2@227.95,695.28
  Top w23.62: H2.7@246.85,503.54 246,502.69 246,496.61 205.51,456.12 205.51,454.72 67.32,454.72 ; JP1.1@468.11,732.28 468.11,733.46 436.61,764.96 125.2,764.96 67.32,707.09 67.32,695.28 67.32,454.72 ; C4.1@1083.07,105.59 1074.49,114.17 662.2,114.17 639.37,91.34 125.2,91.34 67.32,149.21 67.32,454.72
  Top w31.5: C4.1@1083.07,105.59 1095.2,117.72 1283.86,117.72 1333.46,166.54 v2(1348.03,166.54)
  Bottom w7.87: 852.76,524.41 853.94,525.59
  Bottom w11.81: H4.7@561.81,503.54 575.72,503.54 620.08,547.9 620.08,595.28 644.88,620.08 798.43,620.08 832.48,586.02 U3.8@832.48,524.41 ; U4.8@805.51,409.45 805.51,455.91 832.68,483.07 832.68,524.21 U3.8@832.48,524.41 ; 852.76,524.41 U3.8@832.48,524.41 ; 853.94,525.59 872.44,544.09 R4.2@930.71,544.09
  Bottom w23.62: H2.7@246.85,503.54 277.95,472.44 279.92,472.44 298.82,453.54 511.81,453.54 H4.7@561.81,503.54
  Bottom w31.5: v2(1348.03,166.54) 1400.29,165.86 1455.51,221.08 R14.1@1516.93,221.08 1565.57,221.08 U2.5@1570.87,226.38
VDD: C1.2 D2.2 H3.1 JP1.2 R1.2 U1.6 | length 2111.5
  Top w23.62: JP1.2@568.11,732.28 589.17,711.22 589.57,711.22 605.12,695.67 1066.54,695.67 1231.1,531.1 1231.1,494.88 ; D2.2@1209.16,370.87 1231.1,392.81 1231.1,494.88 ; v1(1397.64,295.28) 1490.94,388.58 v1@1518.9,388.58 ; v1(1519.69,387.8) v1@1518.9,388.58 ; 1231.1,494.88 1412.6,494.88 v1@1518.9,388.58
  Bottom w11.81: H3.1@1192.91,59.06 1190.76,59.27 1190.63,59.27 1161.32,88.58 1087.4,88.58 1045.28,130.71 1044.88,130.71 1044.88,195.28 1144.09,294.49 1151.97,294.49 1152.76,295.28 U1.6@1357.09,295.28
  Bottom w13.78: v1(1397.64,295.28) 1424.02,295.28 C1.2@1430.32,301.57
  Bottom w23.62: U1.6@1357.09,295.28 v1(1397.64,295.28) ; R1.2@1489.76,391.34 1516.14,391.34 v1(1519.69,387.8)
VPP: C2.2 H2.8 H4.8 R4.1 R6.2 | length 1095.5
  Bottom w7.87: H2.8@146.85,503.54 194.88,551.57 413.78,551.57 H4.8@461.81,503.54 508.27,550 509.06,550 509.84,550.79 582.68,550.79 601.57,569.69 601.57,607.09 637.4,642.91 878.74,642.91 966.14,555.51 966.14,544.09 966.14,542.91 968.9,542.91 R4.1@970.08,544.09 C2.2@970.08,501.58 970.08,499.61 R6.2@928.35,457.87
pads on no net: C1_1.1 C1_1.2 C1_1_1.1 C1_1_1.2 C1_2.1 C1_2.2 C1_2_1.1 C1_2_1.2 C1_3.1 C1_3.2 C1_3_1.1 C1_3_1.2 C1_4.1 C1_4.2 C2_1.1 C2_1.2 C2_1_1.1 C2_1_1.2 C2_2.1 C2_2.2 C2_2_1.1 C2_2_1.2 C2_3.1 C2_3.2 C2_3_1.1 C2_3_1.2 C2_4.1 C2_4.2 C3_1.1 C3_1.2 C3_1_1.1 C3_1_1.2 C3_2.1 C3_2.2 C3_2_1.1 C3_2_1.2 C3_3.1 C3_3.2 C3_3_1.1 C3_3_1.2 C3_4.1 C3_4.2 C4_1.1 C4_1.2 C4_1_1.1 C4_1_1.2 C4_2.1 C4_2.2 C4_2_1.1 C4_2_1.2 C4_3.1 C4_3.2 C4_3_1.1 C4_3_1.2 C4_4.1 C4_4.2 C5_1.1 C5_1.2 C5_1_1.1 C5_1_1.2 C5_2.1 C5_2.2 C5_2_1.1 C5_2_1.2 C5_3.1 C5_3.2 C5_3_1.1 C5_3_1.2 C5_4.1 C5_4.2 C6_1.1 C6_1.2 C6_1_1.1 C6_1_1.2 C6_2.1 C6_2.2 C6_2_1.1 C6_2_1.2 C6_3.1 C6_3.2 C6_3_1.1 C6_3_1.2 C6_4.1 C6_4.2 C7_1.1 C7_1.2 C7_1_1.1 C7_1_1.2 C7_2.1 C7_2.2 C7_2_1.1 C7_2_1.2 C7_3.1 C7_3.2 C7_3_1.1 C7_3_1.2 C7_4.1 C7_4.2 D1_1.1 D1_1.2 D1_1_1.1 D1_1_1.2 D1_2.1 D1_2.2 D1_2_1.1 D1_2_1.2 D1_3.1 D1_3.2 D1_3_1.1 D1_3_1.2 D1_4.1 D1_4.2 D2_1.1 D2_1.2 D2_1_1.1 D2_1_1.2 D2_2.1 D2_2.2 D2_2_1.1 D2_2_1.2 D2_3.1 D2_3.2 D2_3_1.1 D2_3_1.2 D2_4.1 D2_4.2 H1_1.1 H1_1.2 H1_1.3 H1_1.4 H1_1_1.1 H1_1_1.2 H1_1_1.3 H1_1_1.4 H1_2.1 H1_2.2 H1_2.3 H1_2.4 H1_2_1.1 H1_2_1.2 H1_2_1.3 H1_2_1.4 H1_3.1 H1_3.2 H1_3.3 H1_3.4 H1_3_1.1 H1_3_1.2 H1_3_1.3 H1_3_1.4 H1_4.1 H1_4.2 H1_4.3 H1_4.4 H2_1.1 H2_1.2 H2_1.3 H2_1.4 H2_1.5 H2_1.6 H2_1.7 H2_1.8 H2_1.9 H2_1.10 H2_1_1.1 H2_1_1.2 H2_1_1.3 H2_1_1.4 H2_1_1.5 H2_1_1.6 H2_1_1.7 H2_1_1.8 H2_1_1.9 H2_1_1.10 H2_2.1 H2_2.2 H2_2.3 H2_2.4 H2_2.5 H2_2.6 H2_2.7 H2_2.8 H2_2.9 H2_2.10 H2_2_1.1 H2_2_1.2 H2_2_1.3 H2_2_1.4 H2_2_1.5 H2_2_1.6 H2_2_1.7 H2_2_1.8 H2_2_1.9 H2_2_1.10 H2_3.1 H2_3.2 H2_3.3 H2_3.4 H2_3.5 H2_3.6 H2_3.7 H2_3.8 H2_3.9 H2_3.10 H2_3_1.1 H2_3_1.2 H2_3_1.3 H2_3_1.4 H2_3_1.5 H2_3_1.6 H2_3_1.7 H2_3_1.8 H2_3_1.9 H2_3_1.10 H2_4.1 H2_4.2 H2_4.3 H2_4.4 H2_4.5 H2_4.6 H2_4.7 H2_4.8 H2_4.9 H2_4.10 H3_1.1 H3_1.2 H3_1.3 H3_1.4 H3_1_1.1 H3_1_1.2 H3_1_1.3 H3_1_1.4 H3_2.1 H3_2.2 H3_2.3 H3_2.4 H3_2_1.1 H3_2_1.2 H3_2_1.3 H3_2_1.4 H3_3.1 H3_3.2 H3_3.3 H3_3.4 H3_3_1.1 H3_3_1.2 H3_3_1.3 H3_3_1.4 H3_4.1 H3_4.2 H3_4.3 H3_4.4 H4_1.1 H4_1.2 H4_1.3 H4_1.4 H4_1.5 H4_1.6 H4_1.7 H4_1.8 H4_1.9 H4_1.10 H4_1_1.1 H4_1_1.2 H4_1_1.3 H4_1_1.4 H4_1_1.5 H4_1_1.6 H4_1_1.7 H4_1_1.8 H4_1_1.9 H4_1_1.10 H4_2.1 H4_2.2 H4_2.3 H4_2.4 H4_2.5 H4_2.6 H4_2.7 H4_2.8 H4_2.9 H4_2.10 H4_2_1.1 H4_2_1.2 H4_2_1.3 H4_2_1.4 H4_2_1.5 H4_2_1.6 H4_2_1.7 H4_2_1.8 H4_2_1.9 H4_2_1.10 H4_3.1 H4_3.2 H4_3.3 H4_3.4 H4_3.5 H4_3.6 H4_3.7 H4_3.8 H4_3.9 H4_3.10 H4_3_1.1 H4_3_1.2 H4_3_1.3 H4_3_1.4 H4_3_1.5 H4_3_1.6 H4_3_1.7 H4_3_1.8 H4_3_1.9 H4_3_1.10 H4_4.1 H4_4.2 H4_4.3 H4_4.4 H4_4.5 H4_4.6 H4_4.7 H4_4.8 H4_4.9 H4_4.10 J1_1.1 J1_1.2 J1_1.3 J1_1.4 J1_1.5 J1_1.6 J1_1_1.1 J1_1_1.2 J1_1_1.3 J1_1_1.4 J1_1_1.5 J1_1_1.6 J1_2.1 J1_2.2 J1_2.3 J1_2.4 J1_2.5 J1_2.6 J1_2_1.1 J1_2_1.2 J1_2_1.3 J1_2_1.4 J1_2_1.5 J1_2_1.6 J1_3.1 J1_3.2 J1_3.3 J1_3.4 J1_3.5 J1_3.6 J1_3_1.1 J1_3_1.2 J1_3_1.3 J1_3_1.4 J1_3_1.5 J1_3_1.6 J1_4.1 J1_4.2 J1_4.3 J1_4.4 J1_4.5 J1_4.6 JP1_1.1 JP1_1.2 JP1_1_1.1 JP1_1_1.2 JP1_2.1 JP1_2.2 JP1_2_1.1 JP1_2_1.2 JP1_3.1 JP1_3.2 JP1_3_1.1 JP1_3_1.2 JP1_4.1 JP1_4.2 R1_1.1 R1_1.2 R1_1_1.1 R1_1_1.2 R1_2.1 R1_2.2 R1_2_1.1 R1_2_1.2 R1_3.1 R1_3.2 R1_3_1.1 R1_3_1.2 R1_4.1 R1_4.2 R2_1.1 R2_1.2 R2_1_1.1 R2_1_1.2 R2_2.1 R2_2.2 R2_2_1.1 R2_2_1.2 R2_3.1 R2_3.2 R2_3_1.1 R2_3_1.2 R2_4.1 R2_4.2 R3_1.1 R3_1.2 R3_1_1.1 R3_1_1.2 R3_2.1 R3_2.2 R3_2_1.1 R3_2_1.2 R3_3.1 R3_3.2 R3_3_1.1 R3_3_1.2 R3_4.1 R3_4.2 R4_1.1 R4_1.2 R4_1_1.1 R4_1_1.2 R4_2.1 R4_2.2 R4_2_1.1 R4_2_1.2 R4_3.1 R4_3.2 R4_3_1.1 R4_3_1.2 R4_4.1 R4_4.2 R5_1.1 R5_1.2 R5_1_1.1 R5_1_1.2 R5_2.1 R5_2.2 R5_2_1.1 R5_2_1.2 R5_3.1 R5_3.2 R5_3_1.1 R5_3_1.2 R5_4.1 R5_4.2 R6_1.1 R6_1.2 R6_1_1.1 R6_1_1.2 R6_2.1 R6_2.2 R6_2_1.1 R6_2_1.2 R6_3.1 R6_3.2 R6_3_1.1 R6_3_1.2 R6_4.1 R6_4.2 R7_1.1 R7_1.2 R7_1_1.1 R7_1_1.2 R7_2.1 R7_2.2 R7_2_1.1 R7_2_1.2 R7_3.1 R7_3.2 R7_3_1.1 R7_3_1.2 R7_4.1 R7_4.2 R8_1.1 R8_1.2 R8_1_1.1 R8_1_1.2 R8_2.1 R8_2.2 R8_2_1.1 R8_2_1.2 R8_3.1 R8_3.2 R8_3_1.1 R8_3_1.2 R8_4.1 R8_4.2 R9_1.1 R9_1.2 R9_1_1.1 R9_1_1.2 R9_2.1 R9_2.2 R9_2_1.1 R9_2_1.2 R9_3.1 R9_3.2 R9_3_1.1 R9_3_1.2 R9_4.1 R9_4.2 R10_1.1 R10_1.2 R10_1_1.1 R10_1_1.2 R10_2.1 R10_2.2 R10_2_1.1 R10_2_1.2 R10_3.1 R10_3.2 R10_3_1.1 R10_3_1.2 R10_4.1 R10_4.2 R11_1.1 R11_1.2 R11_1_1.1 R11_1_1.2 R11_2.1 R11_2.2 R11_2_1.1 R11_2_1.2 R11_3.1 R11_3.2 R11_3_1.1 R11_3_1.2 R11_4.1 R11_4.2 R13_1.1 R13_1.2 R13_1_1.1 R13_1_1.2 R13_2.1 R13_2.2 R13_2_1.1 R13_2_1.2 R13_3.1 R13_3.2 R13_3_1.1 R13_3_1.2 R13_4.1 R13_4.2 R14_1.1 R14_1.2 R14_1_1.1 R14_1_1.2 R14_2.1 R14_2.2 R14_2_1.1 R14_2_1.2 R14_3.1 R14_3.2 R14_3_1.1 R14_3_1.2 R14_4.1 R14_4.2 S1_1.1 S1_1.2 S1_1.3 S1_1.4 S1_1_1.1 S1_1_1.2 S1_1_1.3 S1_1_1.4 S1_2.1 S1_2.2 S1_2.3 S1_2.4 S1_2_1.1 S1_2_1.2 S1_2_1.3 S1_2_1.4 S1_3.1 S1_3.2 S1_3.3 S1_3.4 S1_3_1.1 S1_3_1.2 S1_3_1.3 S1_3_1.4 S1_4.1 S1_4.2 S1_4.3 S1_4.4 U1.20 U1.22 U1.23 U1_1.1 U1_1.2 U1_1.3 U1_1.4 U1_1.5 U1_1.6 U1_1.7 U1_1.8 U1_1.9 U1_1.10 U1_1.11 U1_1.12 U1_1.13 U1_1.14 U1_1.15 U1_1.16 U1_1.17 U1_1.18 U1_1.19 U1_1.20 U1_1.21 U1_1.22 U1_1.23 U1_1.24 U1_1.25 U1_1.26 U1_1.27 U1_1.28 U1_1.29 U1_1.30 U1_1.31 U1_1.32 U1_1_1.1 U1_1_1.2 U1_1_1.3 U1_1_1.4 U1_1_1.5 U1_1_1.6 U1_1_1.7 U1_1_1.8 U1_1_1.9 U1_1_1.10 U1_1_1.11 U1_1_1.12 U1_1_1.13 U1_1_1.14 U1_1_1.15 U1_1_1.16 U1_1_1.17 U1_1_1.18 U1_1_1.19 U1_1_1.20 U1_1_1.21 U1_1_1.22 U1_1_1.23 U1_1_1.24 U1_1_1.25 U1_1_1.26 U1_1_1.27 U1_1_1.28 U1_1_1.29 U1_1_1.30 U1_1_1.31 U1_1_1.32 U1_2.1 U1_2.2 U1_2.3 U1_2.4 U1_2.5 U1_2.6 U1_2.7 U1_2.8 U1_2.9 U1_2.10 U1_2.11 U1_2.12 U1_2.13 U1_2.14 U1_2.15 U1_2.16 U1_2.17 U1_2.18 U1_2.19 U1_2.20 U1_2.21 U1_2.22 U1_2.23 U1_2.24 U1_2.25 U1_2.26 U1_2.27 U1_2.28 U1_2.29 U1_2.30 U1_2.31 U1_2.32 U1_2_1.1 U1_2_1.2 U1_2_1.3 U1_2_1.4 U1_2_1.5 U1_2_1.6 U1_2_1.7 U1_2_1.8 U1_2_1.9 U1_2_1.10 U1_2_1.11 U1_2_1.12 U1_2_1.13 U1_2_1.14 U1_2_1.15 U1_2_1.16 U1_2_1.17 U1_2_1.18 U1_2_1.19 U1_2_1.20 U1_2_1.21 U1_2_1.22 U1_2_1.23 U1_2_1.24 U1_2_1.25 U1_2_1.26 U1_2_1.27 U1_2_1.28 U1_2_1.29 U1_2_1.30 U1_2_1.31 U1_2_1.32 U1_3.1 U1_3.2 U1_3.3 U1_3.4 U1_3.5 U1_3.6 U1_3.7 U1_3.8 U1_3.9 U1_3.10 U1_3.11 U1_3.12 U1_3.13 U1_3.14 U1_3.15 U1_3.16 U1_3.17 U1_3.18 U1_3.19 U1_3.20 U1_3.21 U1_3.22 U1_3.23 U1_3.24 U1_3.25 U1_3.26 U1_3.27 U1_3.28 U1_3.29 U1_3.30 U1_3.31 U1_3.32 U1_3_1.1 U1_3_1.2 U1_3_1.3 U1_3_1.4 U1_3_1.5 U1_3_1.6 U1_3_1.7 U1_3_1.8 U1_3_1.9 U1_3_1.10 U1_3_1.11 U1_3_1.12 U1_3_1.13 U1_3_1.14 U1_3_1.15 U1_3_1.16 U1_3_1.17 U1_3_1.18 U1_3_1.19 U1_3_1.20 U1_3_1.21 U1_3_1.22 U1_3_1.23 U1_3_1.24 U1_3_1.25 U1_3_1.26 U1_3_1.27 U1_3_1.28 U1_3_1.29 U1_3_1.30 U1_3_1.31 U1_3_1.32 U1_4.1 U1_4.2 U1_4.3 U1_4.4 U1_4.5 U1_4.6 U1_4.7 U1_4.8 U1_4.9 U1_4.10 U1_4.11 U1_4.12 U1_4.13 U1_4.14 U1_4.15 U1_4.16 U1_4.17 U1_4.18 U1_4.19 U1_4.20 U1_4.21 U1_4.22 U1_4.23 U1_4.24 U1_4.25 U1_4.26 U1_4.27 U1_4.28 U1_4.29 U1_4.30 U1_4.31 U1_4.32 U2_1.1 U2_1.2 U2_1.3 U2_1.4 U2_1.5 U2_1_1.1 U2_1_1.2 U2_1_1.3 U2_1_1.4 U2_1_1.5 U2_2.1 U2_2.2 U2_2.3 U2_2.4 U2_2.5 U2_2_1.1 U2_2_1.2 U2_2_1.3 U2_2_1.4 U2_2_1.5 U2_3.1 U2_3.2 U2_3.3 U2_3.4 U2_3.5 U2_3_1.1 U2_3_1.2 U2_3_1.3 U2_3_1.4 U2_3_1.5 U2_4.1 U2_4.2 U2_4.3 U2_4.4 U2_4.5 U3_1.1 U3_1.2 U3_1.3 U3_1.4 U3_1.5 U3_1.6 U3_1.7 U3_1.8 U3_1_1.1 U3_1_1.2 U3_1_1.3 U3_1_1.4 U3_1_1.5 U3_1_1.6 U3_1_1.7 U3_1_1.8 U3_2.1 U3_2.2 U3_2.3 U3_2.4 U3_2.5 U3_2.6 U3_2.7 U3_2.8 U3_2_1.1 U3_2_1.2 U3_2_1.3 U3_2_1.4 U3_2_1.5 U3_2_1.6 U3_2_1.7 U3_2_1.8 U3_3.1 U3_3.2 U3_3.3 U3_3.4 U3_3.5 U3_3.6 U3_3.7 U3_3.8 U3_3_1.1 U3_3_1.2 U3_3_1.3 U3_3_1.4 U3_3_1.5 U3_3_1.6 U3_3_1.7 U3_3_1.8 U3_4.1 U3_4.2 U3_4.3 U3_4.4 U3_4.5 U3_4.6 U3_4.7 U3_4.8 U4_1.1 U4_1.2 U4_1.3 U4_1.4 U4_1.5 U4_1.6 U4_1.7 U4_1.8 U4_1_1.1 U4_1_1.2 U4_1_1.3 U4_1_1.4 U4_1_1.5 U4_1_1.6 U4_1_1.7 U4_1_1.8 U4_2.1 U4_2.2 U4_2.3 U4_2.4 U4_2.5 U4_2.6 U4_2.7 U4_2.8 U4_2_1.1 U4_2_1.2 U4_2_1.3 U4_2_1.4 U4_2_1.5 U4_2_1.6 U4_2_1.7 U4_2_1.8 U4_3.1 U4_3.2 U4_3.3 U4_3.4 U4_3.5 U4_3.6 U4_3.7 U4_3.8 U4_3_1.1 U4_3_1.2 U4_3_1.3 U4_3_1.4 U4_3_1.5 U4_3_1.6 U4_3_1.7 U4_3_1.8 U4_4.1 U4_4.2 U4_4.3 U4_4.4 U4_4.5 U4_4.6 U4_4.7 U4_4.8 W1_1.1 W1_1.2 W1_1_1.1 W1_1_1.2 W1_2.1 W1_2.2 W1_2_1.1 W1_2_1.2 W1_3.1 W1_3.2 W1_3_1.1 W1_3_1.2 W1_4.1 W1_4.2 X1_1.1 X1_1.2 X1_1.3 X1_1.4 X1_1_1.1 X1_1_1.2 X1_1_1.3 X1_1_1.4 X1_2.1 X1_2.2 X1_2.3 X1_2.4 X1_2_1.1 X1_2_1.2 X1_2_1.3 X1_2_1.4 X1_3.1 X1_3.2 X1_3.3 X1_3.4 X1_3_1.1 X1_3_1.2 X1_3_1.3 X1_3_1.4 X1_4.1 X1_4.2 X1_4.3 X1_4.4